# Altium PCB A8固件8通接收机.PcbDoc
Units mm, origin at the board's own origin, x right, y up, seen from the top; angles counter-clockwise.
Board outline 25.4 x 22.35 mm, 2 copper layers (Top Layer, Bottom Layer), stack 1.271 mm thick; 19 components, 32 nets, 101 pads, 33 vias.
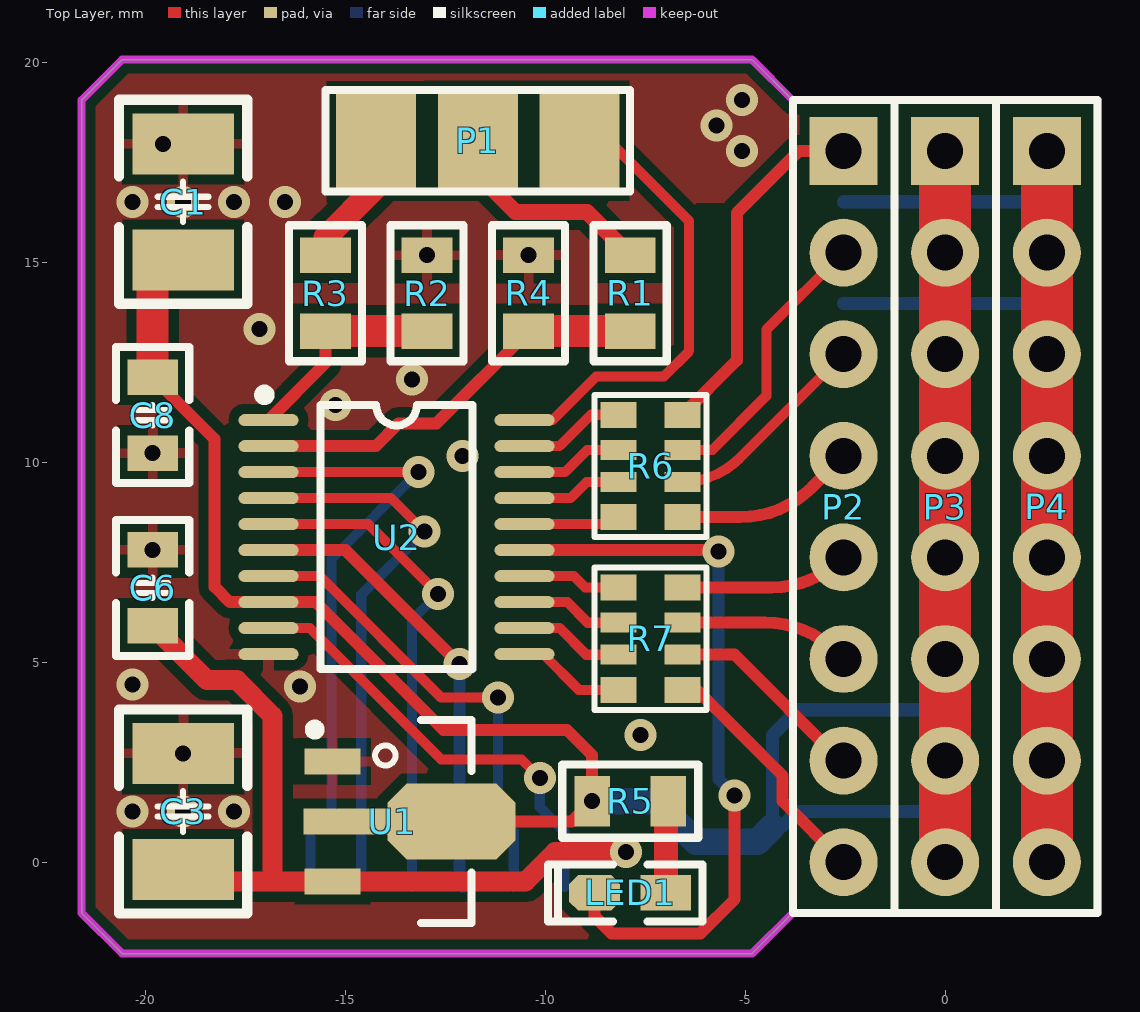
[diagram p0: Top Layer view]
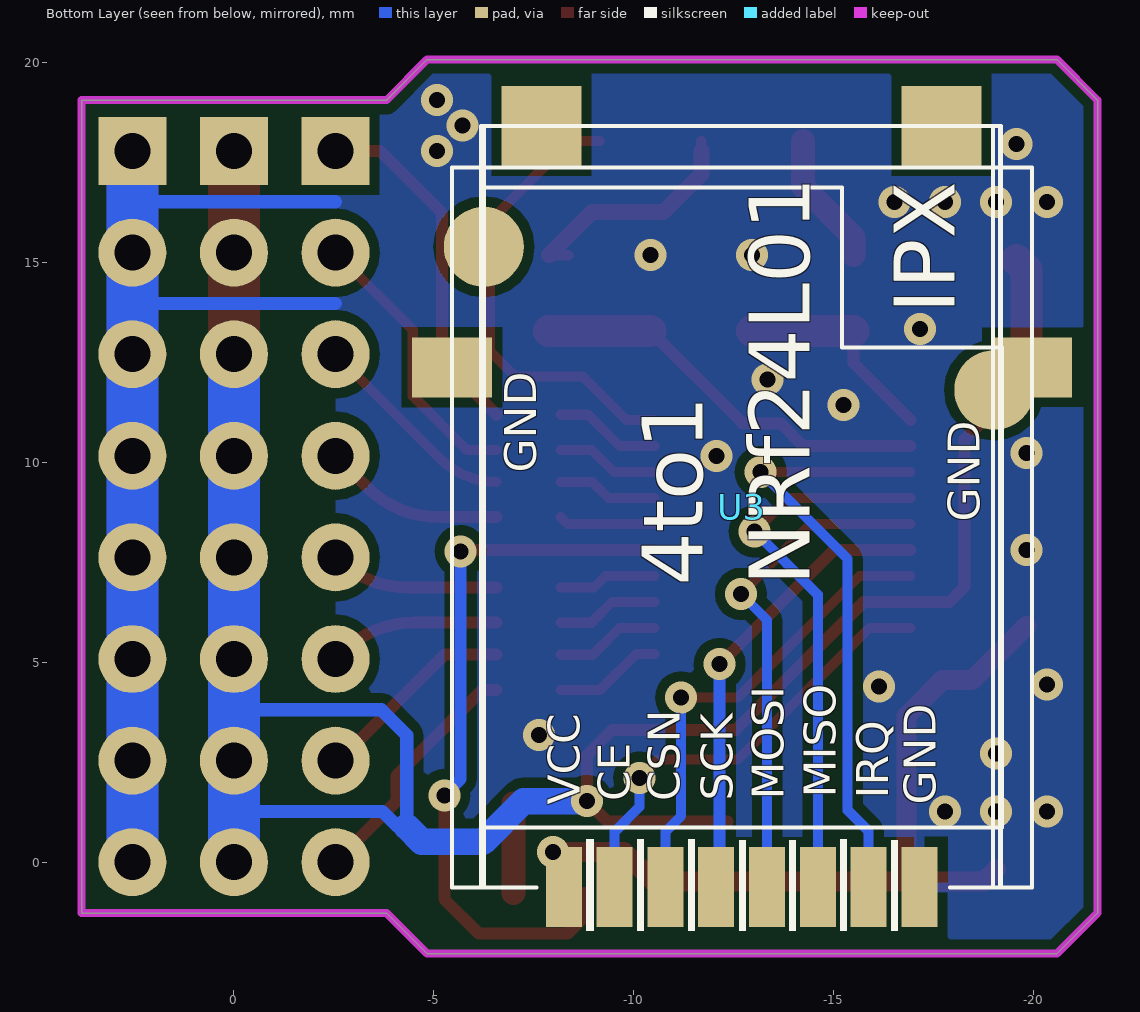
[diagram p1: Bottom Layer view, seen from below]

## Layer stack, top to bottom
Top Solder: solder mask 0.0102, Solder Resist, Dk 3.5
Top Layer: signal copper 0.0356
Dielectric1: core 1.2, FR-4, Dk 4.8
Bottom Layer: signal copper 0.0356
Bottom Solder: solder mask 0.0102, Solder Resist, Dk 3.5

## Board outline
-21.59,-1.27 -20.574,-2.286 -4.826,-2.286 -3.81,-1.27 3.81,-1.27 3.81,19.05 -3.81,19.05 -4.826,20.066 -20.574,20.066 -21.59,19.05

## Design rules (kind name [scope] priority, off if disabled: settings)
Clearance [All] p1: gap=0.254 ignorepadtopadclearanceinfootprint=FALSE except(0: Arc-Hole Track-Hole SMDPad-Hole THPad-Hole Via-Hole Fill-Hole Poly-Hole Region-Hole Text-Hole)
ComponentClearance [All] p1 off: gap=0.254 collisioncheckmode=3 verticalgap=0.254 showdistances=FALSE
PolygonConnect [All] p1: connectstyle=Relief reliefconductorwidth=0.254 reliefentries=4 polygonreliefangle="90 Angle" airgapwidth=0.254
RoutingVias [All] p1: holewidth=0.711 width=1.27 viastyle="Through Hole" minholewidth=0.711 minwidth=1.27 maxholewidth=0.711 maxwidth=1.27
SilkToSolderMaskClearance SilkscreenOverComponentPads [IsPad] p1: minsilkscreentomaskgap=0.254 clearancetoexposedcopper=TRUE
SolderMaskExpansion [All] p1: expansion=0.102 istentingtop=FALSE
Width [All] p1: maxlimit=2 minlimit=0.254 preferedwidth=0.254
28 further rules are at their usual default settings.

## Components (designator, comment, footprint, x,y, rotation, side; value= is the part's Value field where it differs from the comment)
C1 "10V10uF" "C 1210_L" -19.05,16.51 r270 top
C3 "10V10uF" "C 1210_L" -19.05,1.27 r270 top
C6 "104" "C 0805_L" -19.812,6.858 r270 top
C8 "104" "C 0805_L" -19.812,11.176 r90 top
LED1 "蓝色" "LED 0603B" -7.874,-0.762 r180 top
P1 "BatIN" 2.54_3pin -10.244,17.88 r180 top
P2 "Header 8" HDR2.54-LI-8P -2.54,8.89 r270 top
P3 "Header 8" HDR2.54-LI-8P 0,8.89 r270 top
P4 "Header 8" HDR2.54-LI-8P 2.54,8.89 r270 top
R1 "20K" "R 0805_L" -7.874,14.224 r270 top
R2 "10K" "R 0805_L" -12.954,14.224 r90 top
R3 "20K" "R 0805_L" -15.494,14.224 r270 top
R4 "10K" "R 0805_L" -10.414,14.224 r270 top
R5 "1K" "R 0805_L" -7.874,1.524 r180 top
R6 "103" RCA-8P4R-0603 -7.366,9.906 r270 top
R7 "103" RCA-8P4R-0603 -7.366,5.588 r270 top
U1 "XC6203_sot89" SOT89_N -13.36,1.016 r270 top
U2 "STC15W401AS_SOP20_DIP20 _TSSOP20" TSSOP20_N -13.716,8.128 r0 top
U3 "nrf24l01" NRF24L01_4TO1 -12.7,8.89 r180 bottom

## Footprints (in the part's own frame and the unit in brackets; to place one, negate y for a bottom-side part, rotate by r counter-clockwise, add the part's x,y. Pads: shape width x height; smd on the part's side, far side on the other; paste and mask are expansions set on the pad)
2.54_3pin [mm]
  rect 2x2.5 smd: 1(3.98,-0.154) 2(1.44,-0.154) 3(-1.1,-0.154)
  silkscreen extent -2.37,-1.42 5.25,1.12
"C 0805_L" [mil]
  rect 35x50 smd: 1(-37.4,0) 2(37.4,0)
  silkscreen extent -67,-36 67,36, body extent -39,-24 39,24, height 20
"C 1210_L" [mm]
  rect 1.524x2.54 smd: 1(-1.45,0) 2(1.45,0)
  silkscreen extent -2.55,-1.6 2.55,1.6, body extent -1.6,-1.29 1.6,1.29, height 1.54
HDR2.54-LI-8P [mm]
  rect 1.7x1.7 hole 0.9: 1(-8.89,0)
  round 1.7 hole 0.9: 2(-6.35,0) 3(-3.81,0) 4(-1.27,0) 5(1.27,0) 6(3.81,0) 7(6.35,0) 8(8.89,0)
  silkscreen extent -10.16,-1.27 10.16,1.27, body extent -10.16,-1.27 10.16,1.27, height 8.5
"LED 0603B" [mil]
  rect 50x35 smd: 1(-35,0.26)
  oct 50x35 smd: 2(35,0.26)
  silkscreen extent -71,-28 81,28, body extent -31,-16 32,16, height 24
NRF24L01_4TO1 [mm]
  rect 2x1.5 smd: 0(-7.25,3.482) 0(7.25,3.482)
  round 2 smd: 0(-6.452,6.495) 0(6.308,2.915)
  rect 0.9x2 smd: 1(-4.453,-9.512) 2(-3.183,-9.512) 3(-1.913,-9.512) 4(-0.643,-9.512) 5(0.627,-9.512) 6(1.897,-9.512) 7(3.167,-9.512) 8(4.437,-9.512)
  rect 2x2 smd: 9(-5.015,9.512) 10(4.985,9.512)
  silkscreen extent -7.25,-10.61 7.25,9.51
"R 0805_L" [mil]
  rect 35x50 smd: 1(-37.4,0) 2(37.4,0)
  silkscreen extent -67,-36 67,36, body extent -39,-25 39,25, height 20
RCA-8P4R-0603 [mm]
  rect 0.65x0.9 smd: 1(-1.28,-0.8) 4(1.28,-0.8) 5(1.28,0.8) 8(-1.28,0.8)
  rect 0.5x0.9 smd: 2(-0.4,-0.8) 3(0.4,-0.8) 6(0.4,0.8) 7(-0.4,0.8)
  silkscreen extent -1.78,-1.4 1.78,1.4, body extent -1.6,-0.8 1.6,0.8, height 0.6
SOT89_N [mm]
  rect 0.65x1.4 smd: 1(-1.5,-1.952) 3(1.5,-1.952)
  oct 1.9x3.2 smd: 2(0,1.016)
  rect 0.65x2.1 smd: 2(0,-1.626)
  silkscreen extent -2.54,-2.52 2.54,1.52, body extent -2.3,-2.4 2.3,1.9, height 1.6
TSSOP20_N [mm] "6.5"
  oval 1.5x0.3 smd: 1(-3.2,2.925) 2(-3.2,2.275) 3(-3.2,1.625) 4(-3.2,0.975) 5(-3.2,0.325) 6(-3.2,-0.325) 7(-3.2,-0.975) 8(-3.2,-1.625) 9(-3.2,-2.275) 10(-3.2,-2.925) 11(3.2,-2.925) 12(3.2,-2.275) 13(3.2,-1.625) 14(3.2,-0.975) 15(3.2,-0.325) 16(3.2,0.325) 17(3.2,0.975) 18(3.2,1.625) 19(3.2,2.275) 20(3.2,2.925)
  silkscreen extent -3.43,-3.3 1.91,3.69, body extent -3.2,-3.25 3.2,3.25, height 1.03

## Part data
LED1: library part LED-SMD
P1: library part "Header 3", "Heade"
P2 P3 P4: library part He
U1: library part XC62

## Via types
v1: diameter 0.8, hole 0.4, Top Layer to Bottom Layer, tented both sides, 33 vias

## Nets (pads, with @x,y where several pads share a name; then routed paths per layer and width w, separated by ;. In a path a pad name is that pad's centre, name@x,y a point inside that pad or via, vN(x,y) a via of type N, cw(c..) or ccw(c..) an arc to the next point about the centre after c; other vN are vias at no path point)
1SAD: P1.3 U2.20 | length 11.7
  Top Layer w0.254: U2.20 -9.81,11.053 -8.722,12.141 -7.036,12.141 -6.401,12.776 -6.401,16.027 -8.407,18.034 P1.3
2S: P1.1 R3.1 | length 3.4
  Top Layer w0.6: R3.1 -15.494,15.621 -14.224,16.891 P1.1
2SAD: R2.1 R3.2 U2.1 | length 5.4
  Top Layer w0.3: U2.1 -15.494,12.475 R3.2
  Top Layer w0.8: R3.2 R2.1
3.3V: C3.2 C6.2 U1.3 U3.1 | length 19.6
  Top Layer w0.5: C6.2 -18.453,4.549 -17.706,4.549 -16.815,3.658 -16.815,-0.484 ; C3.2 -18.746,-0.484 -16.815,-0.484 ; v1(-7.976,0.254) -9.754,0.254 -10.492,-0.484 U1.3 -16.815,-0.484
3S: P1.2 R1.1 | length 6
  Top Layer w0.254: P1.2@-11.684,17.785 P1.2 ; R1.1@-8.367,15.174 R1.1
  Top Layer w0.4: P1.2@-11.684,17.785 -11.684,17.196 -10.744,16.256 -8.956,16.256 R1.1
3SAD: R1.2 R4.2 U2.2 | length 10.2
  Top Layer w0.3: U2.2 -14.235,10.403 -13.665,10.973 -12.715,10.973 R4.2
  Top Layer w0.8: R4.2 R1.2
CE: U2.9 U3.2 | length 11.3
  Top Layer w0.254: U2.9 -15.886,5.853 -12.598,2.565 -10.592,2.565 v1(-10.135,2.108)
  Bottom Layer w0.254: v1(-10.135,2.108) -10.135,1.38 -9.517,0.762 U3.2
CH1: R6.1 U2.19 | length 2.7
  Top Layer w0.254: U2.19 -9.638,10.403 -8.855,11.186 R6.1
CH2: R6.2 U2.18 | length 2.6
  Top Layer w0.254: U2.18 -9.5,9.753 -8.947,10.306 R6.2
CH3: R6.3 U2.17 | length 2.5
  Top Layer w0.254: U2.17 -9.363,9.103 -8.96,9.506 R6.3
CH4: R6.4 U2.16 | length 2.4
  Top Layer w0.254: U2.16 -8.339,8.453 R6.4
CH5: R7.1 U2.14 | length 2.5
  Top Layer w0.254: U2.14 -9.287,7.153 -9.002,6.868 R7.1
CH6: R7.2 U2.13 | length 2.6
  Top Layer w0.254: U2.13 -9.449,6.503 -8.934,5.988 R7.2
CH7: R7.3 U2.12 | length 2.6
  Top Layer w0.254: U2.12 -9.638,5.853 -8.973,5.188 R7.3
CH8: R7.4 U2.11 | length 2.7
  Top Layer w0.254: U2.11 -10.054,5.203 -9.159,4.308 R7.4
CSN: U2.7 U3.3 | length 11.9
  Top Layer w0.254: U2.7 -15.637,7.153 -12.598,4.115 v1(-11.176,4.115)
  Bottom Layer w0.254: v1(-11.176,4.115) -11.176,1.151 -10.787,0.762 U3.3
GND: C1.1 C3.1 C6.1 C8.1 P4.1 P4.2 P4.3 P4.4 P4.5 P4.6 P4.7 P4.8 R2.2 R4.1 U1.1 U2.10 U3.8 | length 45.7
  Top Layer w1.3: P4.8 P4.7 P4.6 P4.5 P4.4 P4.3 P4.2 P4.1
  Bottom Layer w0.33: -2.539,13.97 2.54,13.97 ; 2.54,16.51 -2.539,16.51 ; -2.54,16.509 -2.539,16.51
  Bottom Layer w1.3: P4.8 P4.7 P4.6 P4.5 P4.4 P4.3 2.54,13.97 P4.2 2.54,16.51 P4.1
  other v1: -20.32,1.27 -19.05,1.27 -17.78,1.27 -19.05,2.72 -7.62,3.175 -16.129,4.394 -20.32,4.445 -19.812,7.808 -12.065,10.16 -19.812,10.226 -15.24,11.43 -13.335,12.065 -17.145,13.335 -12.954,15.174 -10.414,15.174 -20.32,16.51 -19.05,16.51 -17.78,16.51 -16.51,16.51 -5.08,17.78 -19.558,17.96 -5.715,18.415 -5.08,19.05
IRQ: U2.3 U3.7 | length 15.2
  Top Layer w0.254: U2.3 v1(-13.169,9.753)
  Bottom Layer w0.254: U3.7 -15.867,0.77 -15.342,1.295 -15.342,7.581 v1(-13.169,9.753)
LED: LED1.2 U2.15 | length 18.3
  Top Layer w0.3: U2.15 -5.695,7.803 v1(-5.664,7.772) ; LED1.2 -8.763,-1.356 -8.337,-1.782 -6.12,-1.782 -5.262,-0.923 v1(-5.262,1.672)
  Bottom Layer w0.3: v1(-5.664,7.772) -5.664,2.075 v1(-5.262,1.672)
MISO: U2.4 U3.6 | length 14.1
  Top Layer w0.254: U2.4 -13.853,9.103 v1(-13.018,8.268)
  Bottom Layer w0.254: U3.6@-14.351,-0.376 U3.6 -14.597,6.688 v1(-13.018,8.268)
MOSI: U2.5 U3.5 | length 12.8
  Top Layer w0.254: U2.5 -14.422,8.453 v1(-12.675,6.706)
  Bottom Layer w0.254: U3.5@-13.157,-0.452 U3.5 -13.327,6.053 v1(-12.675,6.706)
NetLED1_1: LED1.1 R5.1 | length 2.3
  Top Layer w0.4: R5.1@-6.985,1.463 R5.1
  Top Layer w0.6: LED1.1 R5.1@-6.985,1.463
NetP2_1: P2.1 R6.8 | length 8.9
  Top Layer w0.3: R6.8 -5.207,12.545 -5.207,16.231 -3.658,17.78 P2.1
NetP2_2: P2.2 R6.7 | length 7
  Top Layer w0.254: R6.7 -5.823,10.306 -4.47,11.659 -4.47,13.31 P2.2
NetP2_3: P2.3 R6.6 | length 5.3
  Top Layer w0.254: R6.6 ccw(c-6.566,11.515) -5.146,10.094 P2.3
NetP2_4: P2.4 R6.5 | length 4.6
  Top Layer w0.3: R6.5 -5.126,8.626 ccw(c-5.126,11.166) -3.33,9.37 P2.4
NetP2_5: P2.5 R7.8 | length 4.2
  Top Layer w0.3: R7.8 -4.344,6.868 ccw(c-4.344,9.408) -2.548,7.612 P2.5
NetP2_6: P2.6 R7.7 | length 4.3
  Top Layer w0.3: R7.7 -4.5,5.988 cw(c-4.5,3.448) -2.704,5.244 P2.6
NetP2_7: P2.7 R7.6 | length 5.1
  Top Layer w0.3: R7.6 -5.264,5.188 -2.616,2.54 P2.7
NetP2_8: P2.8 R7.5 | length 6.2
  Top Layer w0.3: R7.5 -6.213,4.308 -4.064,2.159 -4.064,1.524 P2.8
SCK: U2.6 U3.4 | length 11.6
  Top Layer w0.3: U2.6 -14.991,7.803 v1(-12.141,4.953)
  Bottom Layer w0.3: v1(-12.141,4.953) -12.141,-0.538 U3.4
VCC: C1.2 C8.2 P3.1 P3.2 P3.3 P3.4 P3.5 P3.6 P3.7 P3.8 R5.2 U1.2 U2.8 | length 71.9
  Top Layer w0.3: C8.2 -18.263,10.577 -18.263,6.883 -17.882,6.503 U2.8 -15.738,6.503 -12.545,3.311 -9.458,3.311 -8.824,2.677 v1(-8.824,1.524) -9.332,1.016 U1.2@-12.344,1.016
  Top Layer w0.8: C8.2 -19.812,14.806 C1.2@-19.558,15.06
  Top Layer w1.3: P3.8 P3.7 P3.6 P3.5 P3.4 P3.3 P3.2 P3.1
  Bottom Layer w0.33: 0,1.27 -3.708,1.27 -4.089,0.889 -4.318,0.889 -4.318,3.175 -3.683,3.81 0,3.81
  Bottom Layer w0.66: v1(-8.824,1.524) -7.239,1.524 -6.223,0.508 -4.699,0.508 -4.318,0.889
  Bottom Layer w1.3: P3.8 0,1.27 P3.7 0,3.81 P3.6 P3.5 P3.4 P3.3
pads on no net: U3.0 U3.9 U3.10

## Polygon pours and split planes (outlines as drawn)
GND on Bottom Layer "Bottom Layer-No Net" (solid, remove dead copper, pour order 4): -2.54,20.32 -21.59,20.32 -21.59,-2.54 -2.54,-2.54
GND on Top Layer "Bottom Layer-No Net" (solid, remove dead copper, pour order 11): -2.54,20.32 ccw(c-2.614,20.246) -2.614,20.35 -21.59,20.35 -21.59,-2.286 -2.704,-2.286

## Keep-outs
Keep-Out Layer:
  the board outline again, w0.2

## Silkscreen, mask and mechanical layers (free items; w line width, h text height)
Bottom Solder:
  text "BY Dream" at -17.297,3.788 h2 r270

## Text inside footprints (layer, text, board x,y; h text height)
U3: Bottom Overlay "GND" at -18.642,8.509 h0.8 r270; Bottom Overlay "GND" at -17.54,1.442 h0.8 r270; Bottom Overlay "IRQ" at -16.36,1.592 h0.8 r270; Bottom Overlay "MISO" at -15.05,1.612 h0.8 r270; Bottom Overlay "MOSI" at -13.75,1.562 h0.8 r270; Bottom Overlay "SCK" at -12.47,1.542 h0.8 r270; Bottom Overlay "CSN" at -11.15,1.522 h0.8 r270; Bottom Overlay "CE" at -9.9,1.522 h0.8 r270; Bottom Overlay "GND" at -7.56,9.742 h0.8 r270; Bottom Overlay "VCC" at -8.64,1.442 h0.8 r270; Bottom Overlay "4to1" at -11.717,6.909 h1.52 r270; Bottom Overlay "NRf24L01" at -14.392,6.909 h1.52 r270; Bottom Overlay "IPX" at -18.017,13.709 h1.52 r270